# Altium PCB EMU.PcbDoc
Units mil, origin at the board's own origin, x right, y up, seen from the top; angles counter-clockwise.
Board outline 985.8 x 985.52 mil, 2 copper layers (Top Layer, Bottom Layer); 8 components, 10 nets, 59 pads, 1 vias.
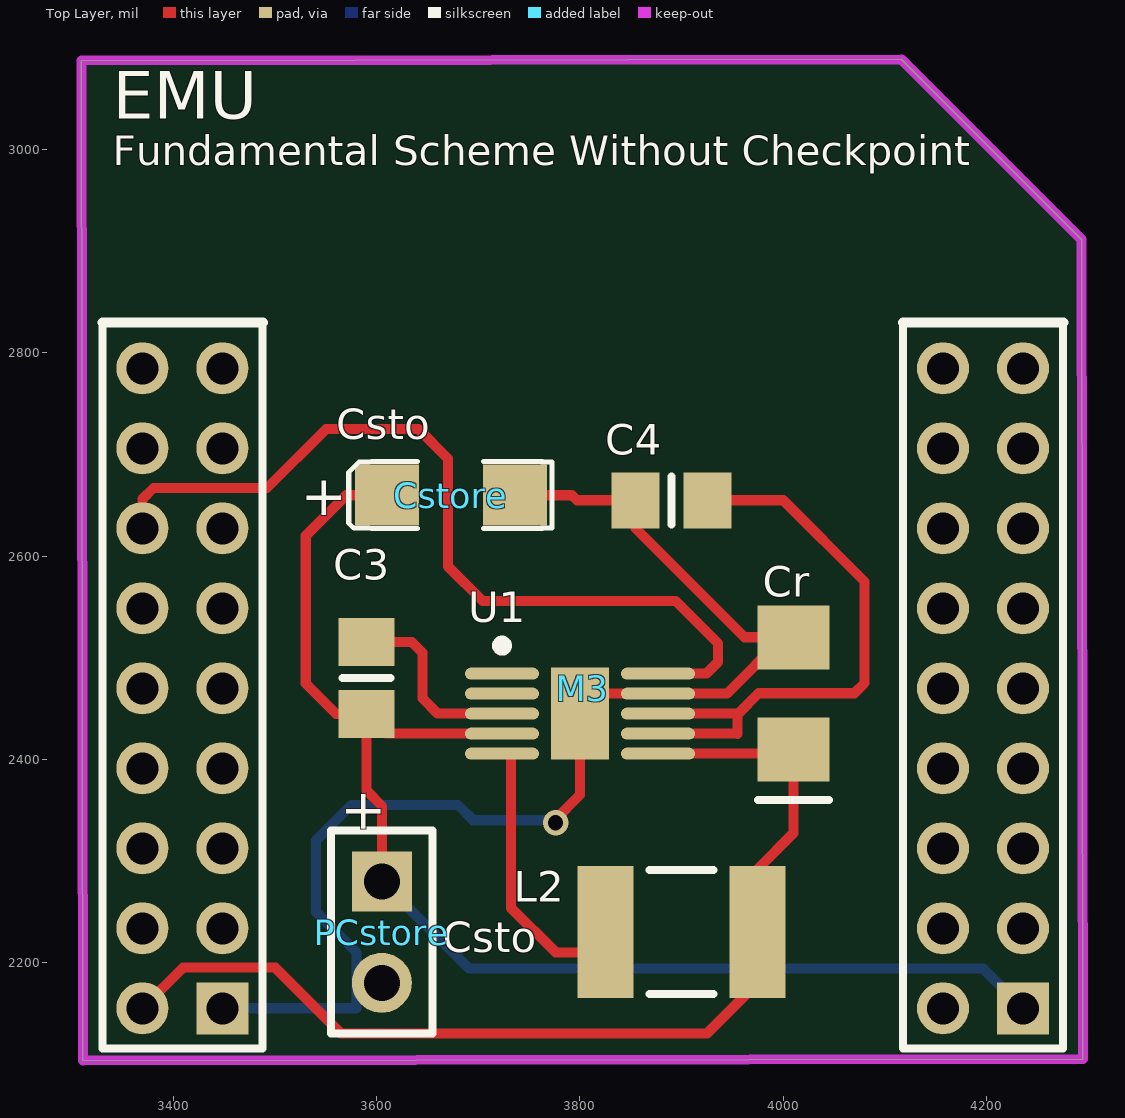
[diagram p0: Top Layer view]
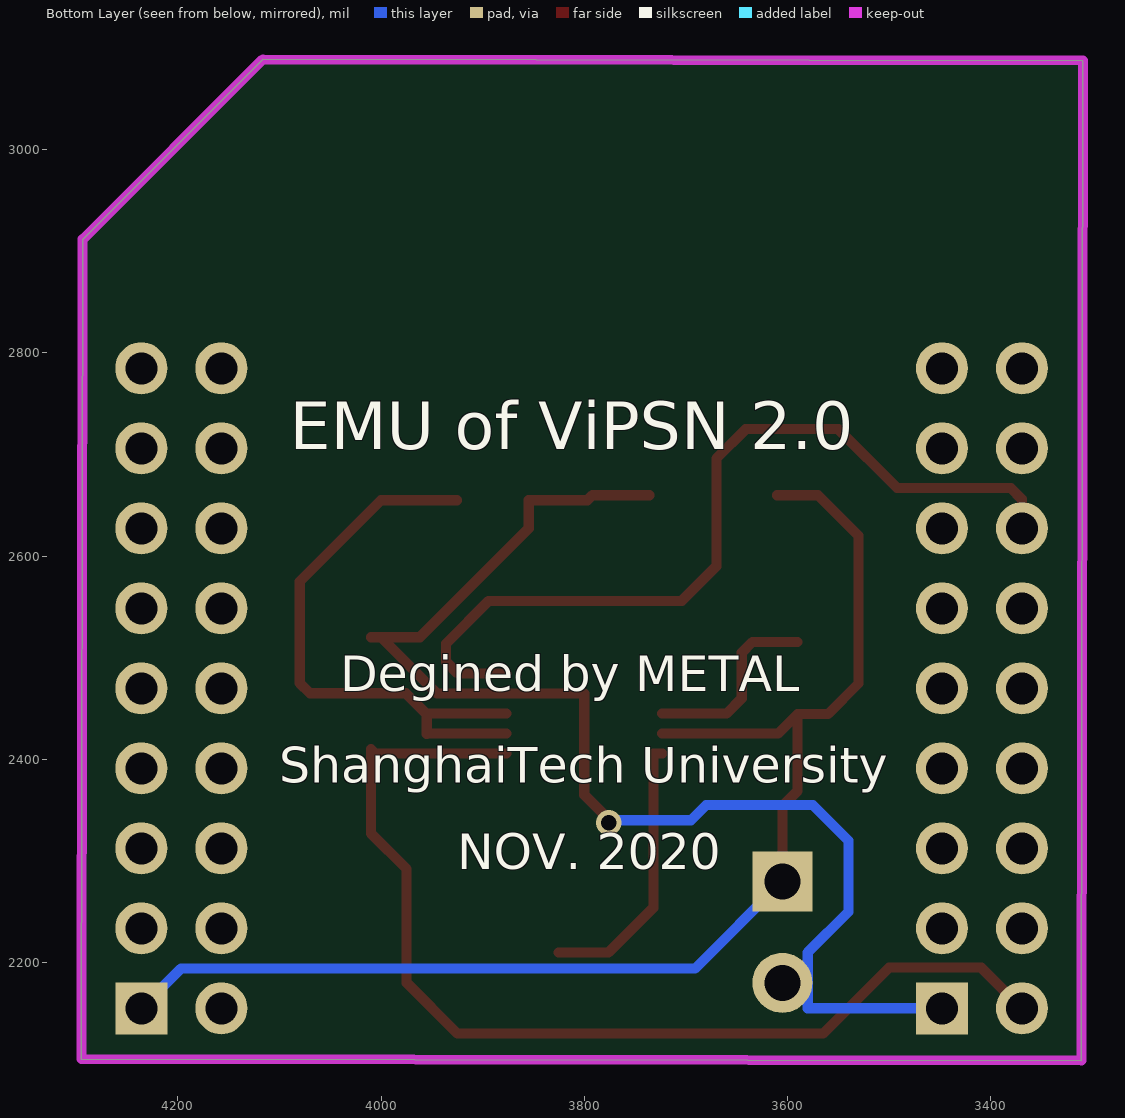
[diagram p1: Bottom Layer view, seen from below]

## Layer stack, top to bottom
Top Layer: signal copper 1.4
Dielectric: dielectric 12.6, FR-4, Dk 4.8
Bottom Layer: signal copper 1.4

## Board outline
3310.75,2103.45 3309.2,3087.7 4116.29,3088.97 4293.45,2911.81 4293.73,2912.09 4295,2105

## Design rules (kind name [scope] priority, off if disabled: settings)
Clearance [All] p1: gap=6
PolygonConnect [All] p1: connectstyle=Relief reliefconductorwidth=10 reliefentries=4 polygonreliefangle="90 Angle"
RoutingVias [All] p1: holewidth=15 width=25 viastyle="Through Hole" minholewidth=15 minwidth=25 maxholewidth=15 maxwidth=25
SilkscreenOverComponentPads SilkToSolderMaskClearance [IsPad] p1: minsilkscreentomaskgap=10
SolderMaskExpansion [All] p1: expansion=4
Width [All] p1: maxlimit=10 minlimit=10 preferedwidth=10
27 further rules are at their usual default settings.

## Components (designator, comment, footprint, x,y, rotation, side; value= is the part's Value field where it differs from the comment)
C3 "CAP" 6-0805_N 3590,2480 r270 top
C4 "CAP" 6-0805_N 3890,2655 r180 top
Cr "6.3V" 3216[1206] 4010,2465 r90 top
Cstore "Cap Pol1" 钽电容 3610,2665 r90 top
L2 "10uH" 1812 3900,2230 r0 top
M3 "MHDR2X18" module9x4 4235,2785 r180 top
PCstore "Header 2" HDR1X2 3605,2280 r270 top
U1 "LTC3588-1" "LTC 3588-1" 3800,2445 r0 top

## Footprints (in the part's own frame and the unit in brackets; to place one, negate y for a bottom-side part, rotate by r counter-clockwise, add the part's x,y. Pads: shape width x height; smd on the part's side, far side on the other; paste and mask are expansions set on the pad)
6-0805_N [mm] "Chip Resistor, Body 2.0x1.2mm, IPC Medium Density"
  rect 1.2x1.4 smd: 1(-0.9,0) 2(0.9,0)
  silkscreen extent 0,-0.6 0,0.6, body extent -1.07,-0.7 1.07,0.7, height 0.7
1812 [mm] "Chip Capacitor, Body 4.5x3.2mm, IPC High Density"
  rect 1.4x3.3 smd: 1(-1.9,0) 2(1.9,0)
  silkscreen extent -0.8,-1.55 0.8,1.55, body extent -2.4,-1.7 2.4,1.7, height 1.4
3216[1206] [mm] "Chip Resistor; Body 3.2 x 1.6 mm (LxW typ)"
  rect 1.6x1.8 smd: 1(-1.4,0) 2(1.4,0)
  silkscreen extent -2.67,-0.89 -2.67,0.89
HDR1X2 [mm] "Connector; Header; 2 Position"
  rect 1.5x1.5 hole 0.9: 1(0,0)
  round 1.5 hole 0.9: 2(2.54,0)
  silkscreen extent -1.27,-1.27 3.81,1.27
"LTC 3588-1" [mm] "10-Lead Plastic MSOP"
  oval 1.85x0.3 smd: 1(-1.95,1) 2(-1.95,0.5) 3(-1.95,0) 4(-1.95,-0.5) 5(-1.95,-1) 6(1.95,-1) 7(1.95,-0.5) 8(1.95,0) 9(1.95,0.5) 10(1.95,1)
  rect 1.45x2.3 smd: 11(0,0)
  silkscreen extent -2.07,1.58 -1.83,1.82, body extent -1.55,-1.55 1.55,1.55, height 1.1
module9x4 [mm]
  rect 1.3x1.3 hole 0.8: 1(-0.025,16.002) 36(19.99,16.002)
  round 1.3 hole 0.8: 2(21.99,16.002) 3(-0.025,14.002) 4(21.99,14.002) 5(-0.025,12.002) 6(21.99,12.002) 7(-0.025,10.002) 8(21.99,10.002) 9(-0.025,8.002) 10(21.99,8.002) 11(-0.025,6.002) 12(21.99,6.002) 13(-0.025,4.002) 14(21.99,4.002) 15(-0.025,2.002) 16(21.99,2.002) 17(-0.025,0.002) 18(21.99,0.002) 19(1.975,0.002) 20(19.99,0.002) 21(1.975,2.002) 22(19.99,2.002) 23(1.975,4.002) 24(19.99,4.002) 25(1.975,6.002) 26(19.99,6.002) 27(1.975,8.002) 28(19.99,8.002) 29(1.975,10.002) 30(19.99,10.002) 31(1.975,12.002) 32(19.99,12.002) 33(1.975,14.002) 34(19.99,14.002) 35(1.975,16.002)
  silkscreen extent -1.04,-1.14 22.99,17
钽电容 [mil]
  rect 60x62.99 smd: 1(-5,0) 2(-5,-125.98)
  silkscreen extent -38,-162 28,38

## Part data
C3 C4: "Capacitor"
Cr: library part "Cap Pol1", "Polarized Capacitor (Radial)"
Cstore: "Polarized Capacitor (Radial)"
L2: library part INDUCTOR
M3: "Header, 18-Pin, Dual row"
PCstore: "Header, 2-Pin"
U1: "Nanopower energy harvesting power supply"

## Via types
v1: diameter 25, hole 15, Top Layer to Bottom Layer, 1 vias

## Nets (pads, with @x,y where several pads share a name; then routed paths per layer and width w, separated by ;. In a path a pad name is that pad's centre, name@x,y a point inside that pad or via, vN(x,y) a via of type N, cw(c..) or ccw(c..) an arc to the next point about the centre after c; other vN are vias at no path point)
EXTI: M3.12
EXTI2: M3.14 U1.10 | length 855.5
  Top Layer w10: M3.14 3369.25,2656 3380.25,2667 3492,2667 3550,2725 3641.18,2725 3670,2696.18 3670,2590 3704,2556 3894,2556 3935.94,2514.06 3935.94,2495.94 3924.37,2484.37 U1.10
GND: C4.2 Cr.2 Cstore.2 M3.36 PCstore.2 U1.9 U1.11 | length 1275.5
  Top Layer w10: Cstore.2 3792,2660 3797,2655 C4.2 3854.57,2627.43 3961.88,2520.12 Cr.2@4000.12,2520.12 ; v1@3775,2340 3800,2365 U1.11 3800,2464.69 U1.9 3944.69,2464.69 Cr.2@4000.12,2520.12 ; Cr.2 Cr.2@4000.12,2520.12
  Bottom Layer w10: M3.36 3580,2155 3580,2210 3540,2250 3540,2320 3575,2355 3680,2355 3695,2340 v1@3775,2340
  other v1: 3776,2337.63
NetC3_1: C3.1 U1.3 | length 188.8
  Top Layer w10: C3.1 3634.57,2515.43 3645,2505 3645,2460 3660,2445 U1.3
NetC4_1: C4.1 U1.7 U1.8 | length 600.3
  Top Layer w10: U1.7 3955,2425.32 ; U1.8 3935,2445 ; C4.1 4000,2655 4080,2575 4080,2475 4070,2465 3975.62,2465 3955.62,2445 3935.94,2445 ; 3955,2425 3955,2444.68
NetL2_1: L2.1 U1.5 | length 271.8
  Top Layer w10: U1.5 3732,2405.63 3732,2254 3776,2210 L2.1@3825.2,2210
P0.02: M3.10
P0.05: M3.16
VDD: Cr.1 L2.2 M3.2 U1.6 | length 1049.2
  Top Layer w10: M3.2 3409.25,2195 3500,2195 3565,2130 3924.8,2130 3974.8,2180 3974.8,2210 3974.8,2292 4010,2327.2 Cr.1 4005.75,2405.63 U1.6
VSTO: C3.2 Cstore.1 M3.1 PCstore.1 U1.4 | length 1309.2
  Top Layer w10: PCstore.1 3605,2354 3590,2369 C3.2 ; Cstore.1 3570,2660 3530,2620 3530,2474.57 3560,2444.57 C3.2 ; U1.4 3609.25,2425.32 C3.2
  Bottom Layer w10: PCstore.1 3691,2194 4197,2194 M3.1
pads on no net: M3.3 M3.4 M3.5 M3.6 M3.7 M3.8 M3.9 M3.11 M3.13 M3.15 M3.17 M3.18 M3.19 M3.20 M3.21 M3.22 M3.23 M3.24 M3.25 M3.26 M3.27 M3.28 M3.29 M3.30 M3.31 M3.32 M3.33 M3.34 M3.35 U1.1 U1.2

## Keep-outs
Keep-Out Layer:
  lines w10: 4293.45,2911.81 4116.29,3088.97 3309.2,3087.7 3310.75,2103.45 4295,2105 4293.73,2912.09

## Silkscreen, mask and mechanical layers (free items; w line width, h text height)
Top Overlay:
  text "EMU" at 3340,3015 h80
  text "Fundamental Scheme Without Checkpoint" at 3340,2975 h50
  text "Csto" at 3560,2715 h30
  text "+" at 3525,2640 h40
  text "+" at 3570,2371.3 h40 r270
  text "Csto" at 3665,2210 h30
Bottom Overlay:
  text "EMU of ViPSN 2.0" at 4090,2690 h80
  text "Degined by METAL" at 4040,2455 h60
  text "ShanghaiTech University" at 4100,2365 h60
  text "NOV. 2020" at 3925,2280 h60